# EAGLE board PCB_FINAL (EAGLE 9.7.0)
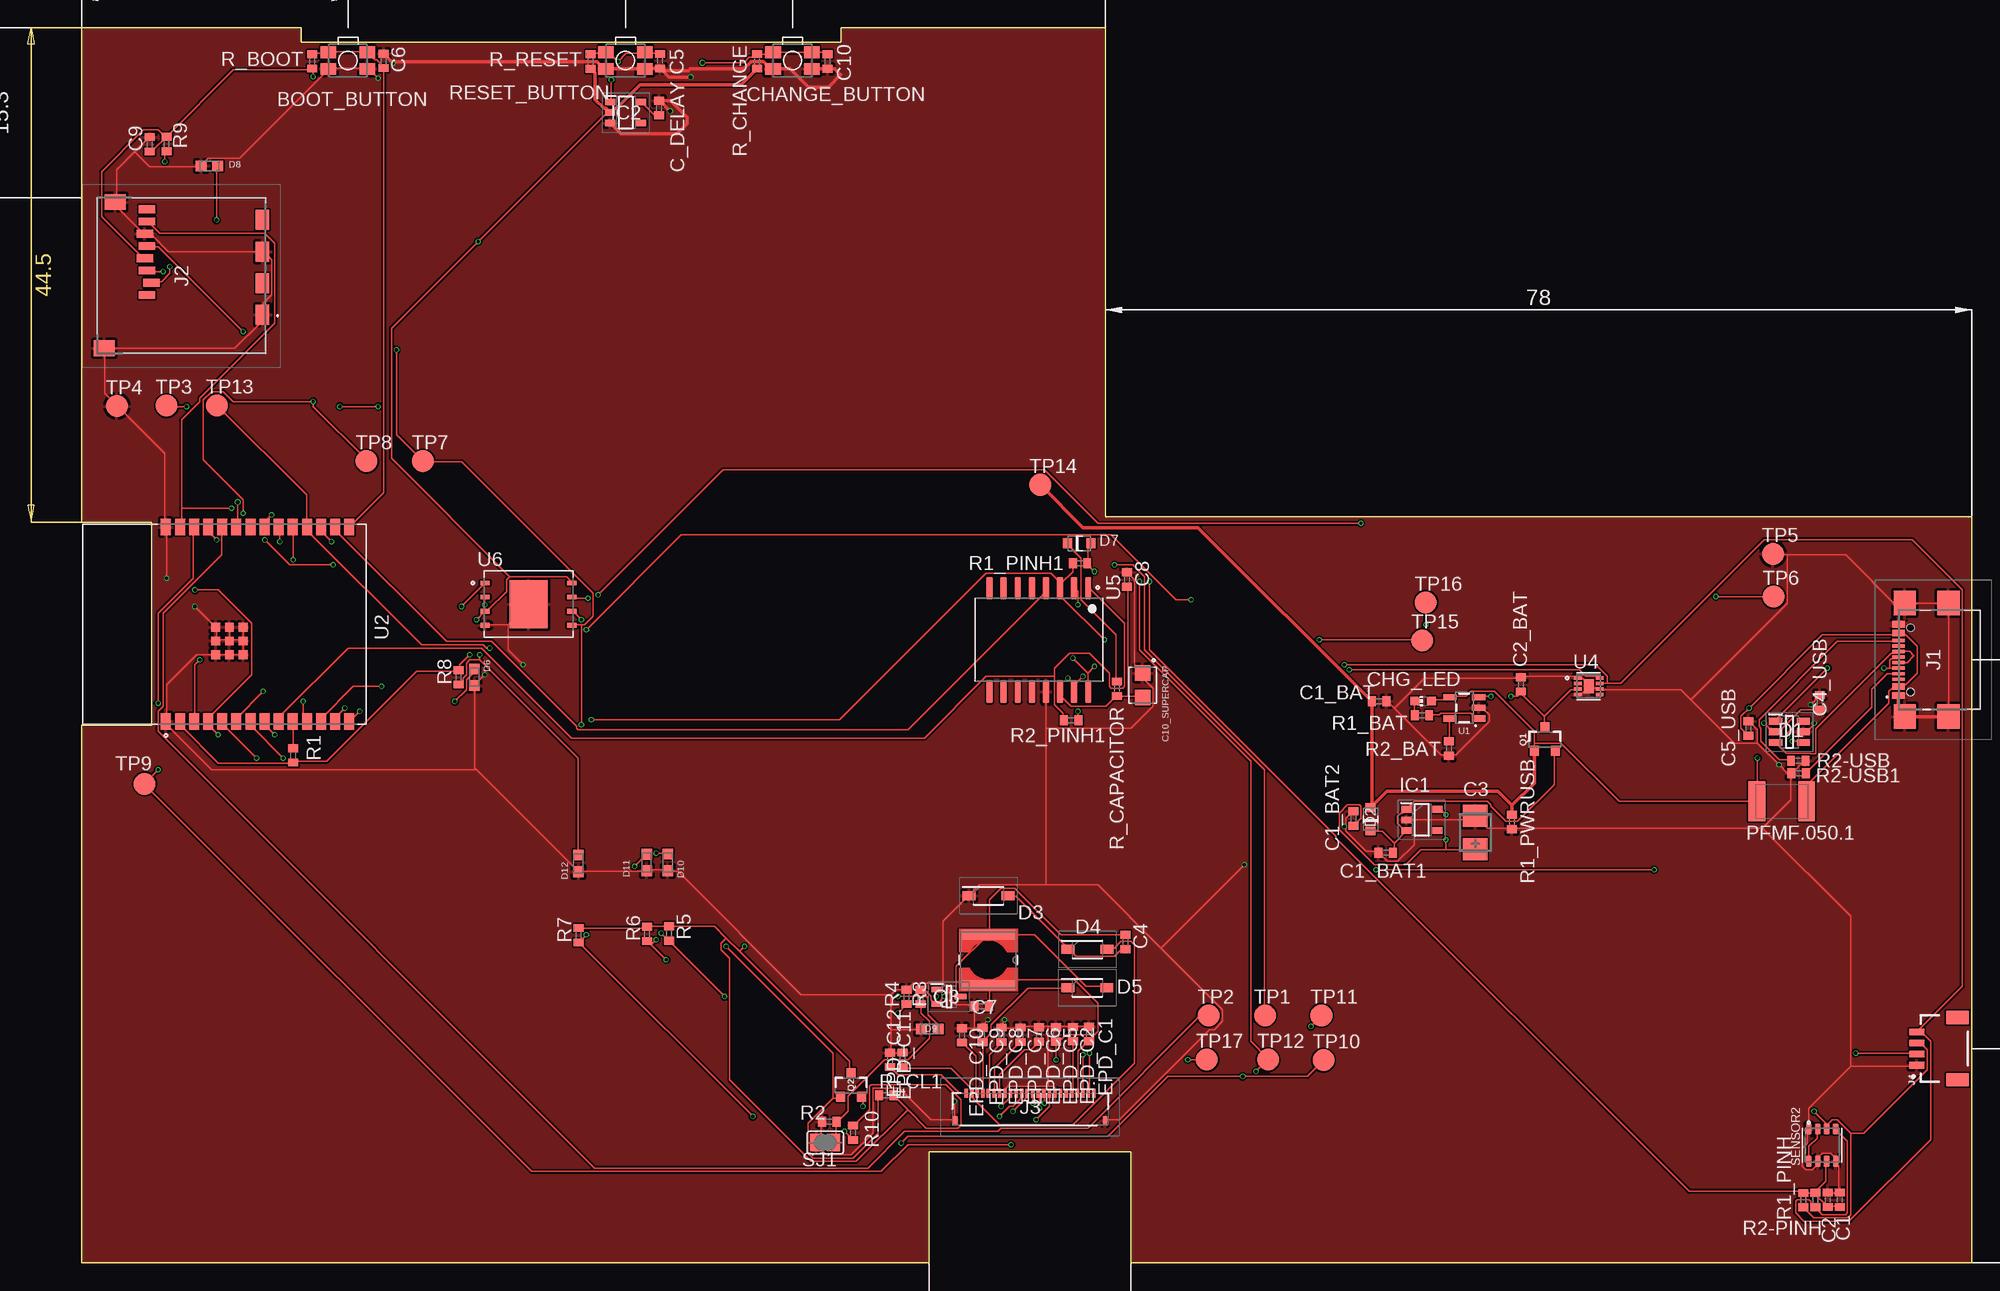
[diagram p0: board, top side]
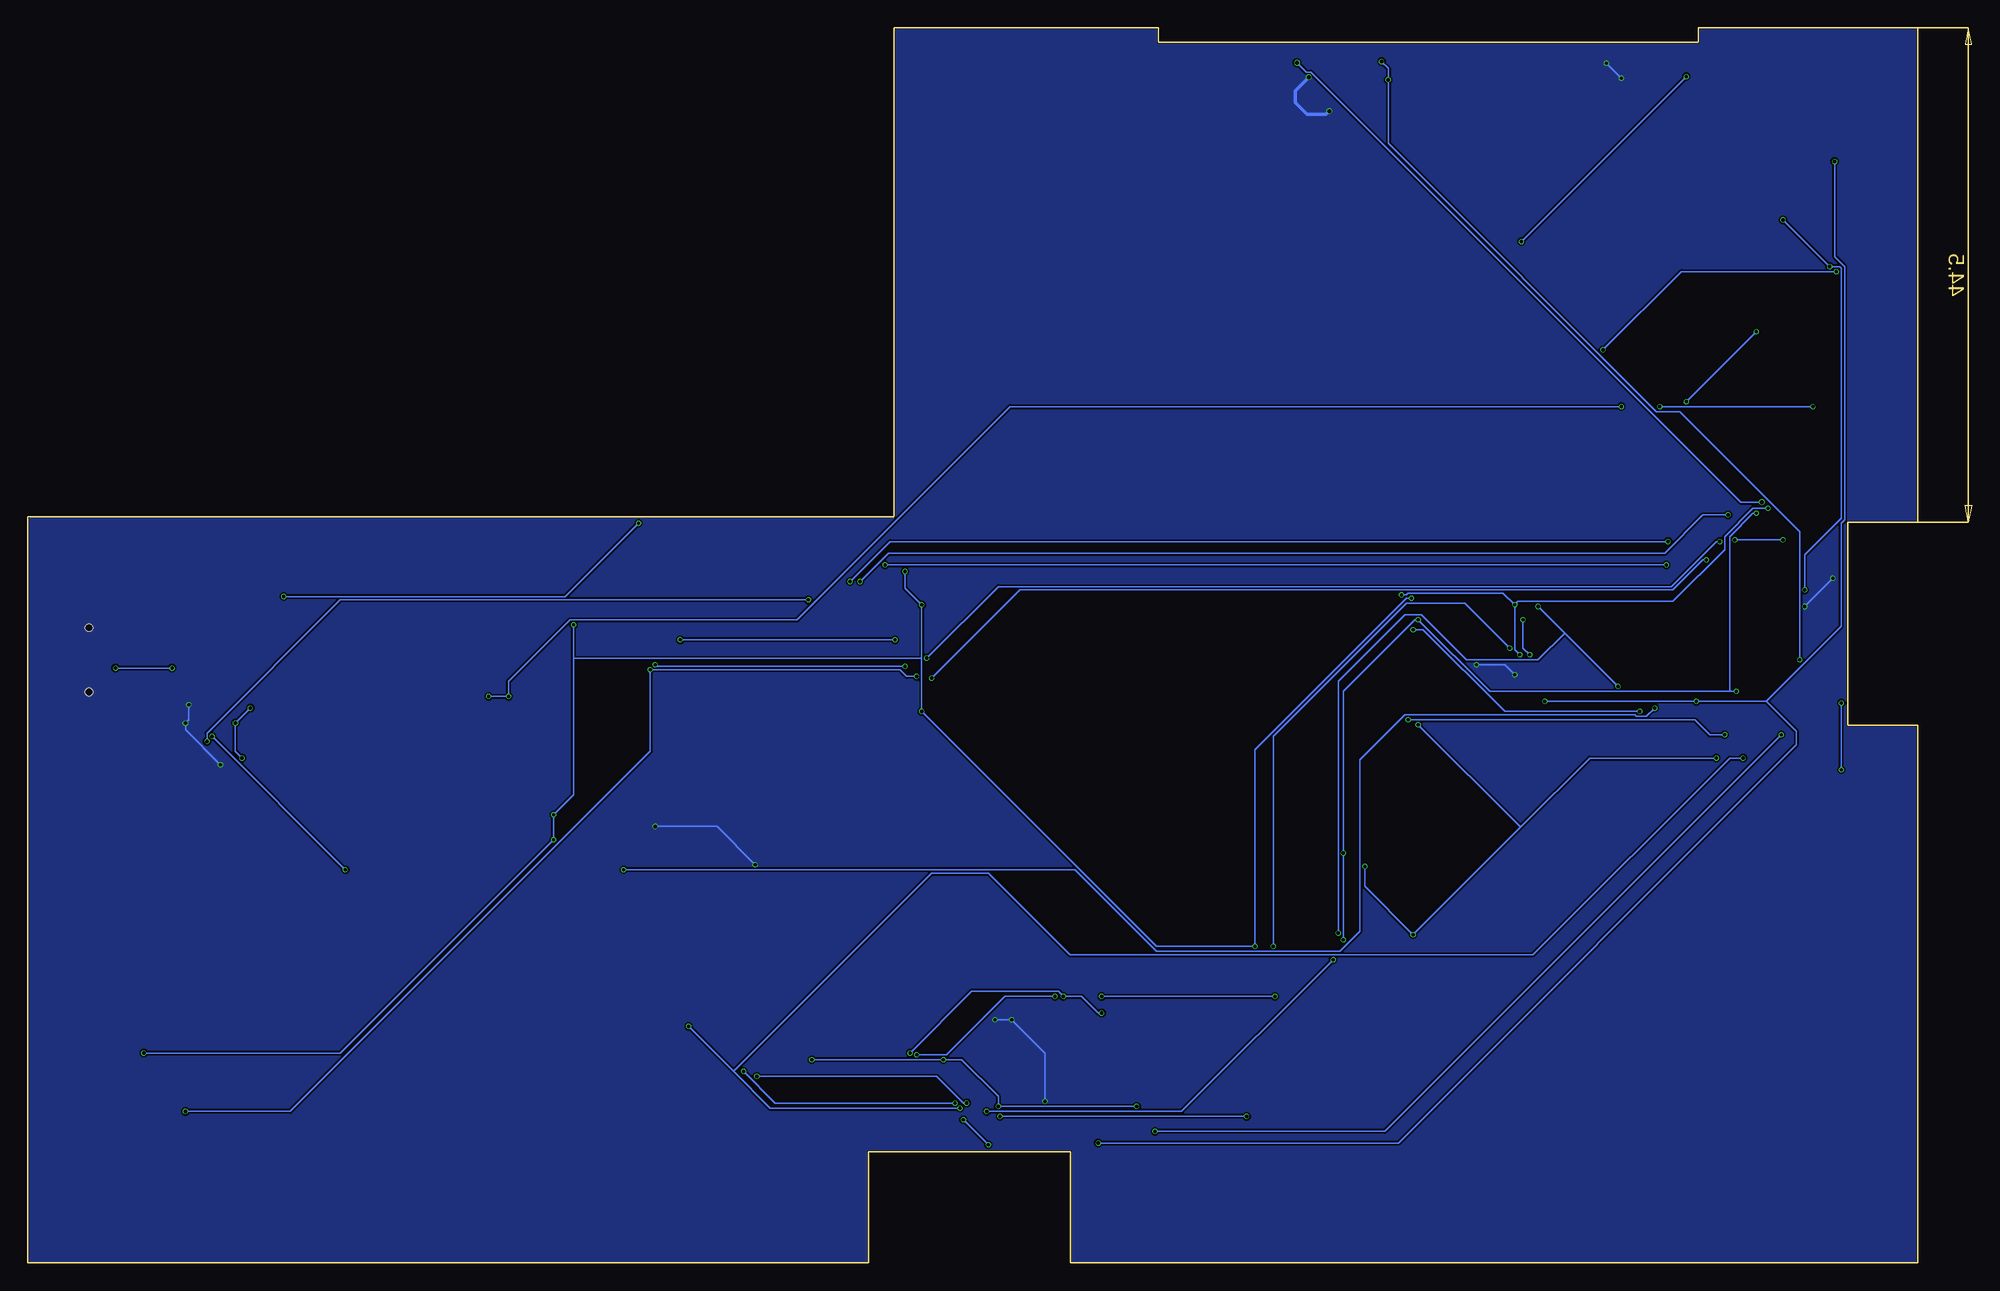
[diagram p1: board, bottom side, seen from below]

Size 170.2 x 111.2 mm. Coordinates in mm from the lower left corner, seen from the top.
Outline: 0,111.2 19.75,111.2 19.75,109.9 68.4,109.9 68.4,111.2 92.2,111.2 92.2,67.2 170.2,67.2 170.2,0 94.5,0 94.5,10 76.3,10 76.3,0 0,0 0,48.4 6.3,48.4 6.3,66.7 0,66.7 0,111.2
Copper layers (1*16): Top 0.035mm / dielectric 1.6mm / Bottom 0.035mm
Design rules "jlcpcb-2layers": minimum track width 0.15mm, minimum drill 0.3mm, track to track 0.15mm, track to pad 5mil, pad to pad 5mil, via to via 5mil, smd to smd 5mil, copper to edge 0mil, drill to drill 6mil, minimum pad ring 10mil, minimum via ring 3mil, stop-mask expansion 4mil, vias tented up to drill 0mil, thermal gap 10mil

## Footprints (pad centres in the part's own frame; a part is rotated, then mirrored left to right if it is on the bottom)
MYBUTTON = smd 1.4 x 1.05: 1 1.75,0.75; 2 -1.75,0.75; 3 -1.75,-0.75; 4 1.75,-0.75
ESP32_WROVER_EAGLE-LTSPICE_C0402 = smd 0.7 x 0.9: 1 -0.65,0; 2 0.65,0
RCL_CT3528 = smd 2 x 2.2: + -1.5,0; - 1.5,0
CAPCP3225X100N = smd 1.4 x 1.4: 1 -1.1,0; 2 1.1,0
ADAFRUIT_CHIP-LED0603 = smd 0.8 x 0.8: A 0,-0.75; C 0,0.75
SOT95P280X145-6N = smd 1.2 x 0.6: 1 -1.25,0.95; 2 -1.25,0; 3 -1.25,-0.95; 4 1.25,-0.95; 5 1.25,0; 6 1.25,0.95
ESP32_WROVER_AVX---SD0805S020S1R0_AVX_SD0805S020S1R0_0 = smd 0.8 x 0.9: 1 -1.05,0; 2 1.05,0
SOD3716X135N = smd 1.15 x 0.8: 1 -1.75,0; 2 1.75,0
DIOC1608X36N = smd 0.97 x 0.94: 1 -0.75,0; 2 0.75,0
SOT95P280X120-5N = smd 0.9 x 0.6: 1 -1.4,0.95; 2 -1.4,0; 3 -1.4,-0.95; 4 1.4,-0.95; 5 1.4,0.95
SOT95P280X125-5N = smd 0.9 x 0.6: 1 -1.4,0.95; 2 -1.4,0; 3 -1.4,-0.95; 4 1.4,-0.95; 5 1.4,0.95
SAMACSYS_PARTS_USB4110GFA = smd 0.3 x 1.15: A1 -3.35,3.678; A4 -2.55,3.678; A5 -1.25,3.678; A6 -0.25,3.678; A7 0.25,3.678; A8 1.25,3.678; A9 2.55,3.678; A12 3.35,3.678; B1 3.05,3.678; B4 2.25,3.678; B5 1.75,3.678; B6 0.75,3.678; B7 -0.75,3.678; B8 -1.75,3.678; B9 -2.25,3.678; B12 -3.05,3.678 | smd 2.18 x 2: MP1 -5.11,-0.827; MP2 5.11,-0.827; MP3 -5.11,3.103; MP4 5.11,3.103 | hole 0.65: -2.89,2.603; 2.89,2.603
112ATAARR03ATTEND = smd 1.8 x 1.2: G1 10.6,10.4; G2 4.9,10.4; S1 7.75,10.4; S2 2.05,10.4 | smd 1.4 x 1.9: G3 13.6,-3.85; G4 0.45,-2.85 | smd 0.7 x 1.5: P1 8.8,0; P2 7.7,0.4; P3 6.6,0; P4 5.5,-0.2; P5 4.4,0; P6 3.3,-0.2; P7 2.2,0; P8 1.1,0
FH34SRJ24S05SH99 = smd 0.3 x 0.8: 1 5.75,1.45; 2 5.25,1.45; 3 4.75,1.45; 4 4.25,1.45; 5 3.75,1.45; 6 3.25,1.45; 7 2.75,1.45; 8 2.25,1.45; 9 1.75,1.45; 10 1.25,1.45; 11 0.75,1.45; 12 0.25,1.45; 13 -0.25,1.45; 14 -0.75,1.45; 15 -1.25,1.45; 16 -1.75,1.45; 17 -2.25,1.45; 18 -2.75,1.45; 19 -3.25,1.45; 20 -3.75,1.45; 21 -4.25,1.45; 22 -4.75,1.45; 23 -5.25,1.45; 24 -5.75,1.45 | smd 0.4 x 0.8: MP1 6.75,-1.05; MP2 -6.75,-1.05
JST04_1MM_RA = smd 0.6 x 1.35: 1 -1.5,0; 2 -0.5,0; 3 0.5,0; 4 1.5,0 | smd 1.2 x 2: NC1 2.8,-3.675; NC2 -2.8,-3.675
IND_4828-WE-TPC_WRE = smd 0.889 x 4.826: 1 -2.286,0; 2 2.286,0
ESP32C6_VARISTOR_CT/CN1812 = smd 1.5 x 3.6: 1 -2.25,0; 2 2.25,0
ESP32_WROVER_SPARKFUN-DISCRETESEMI_SOT23-3 = smd 0.8 x 0.9: 1 -0.95,-1; 2 0.95,-1; 3 0,1.1
SOT65P210X110-3N = smd 1.05 x 0.5: 1 -1.05,0.65; 2 -1.05,-0.65; 3 1.05,0
ESP32_WROVER_EAGLE-LTSPICE_R0402 = smd 0.7 x 0.9: 1 -0.65,0; 2 0.65,0
ESP32_WROVER_BME680_PSON80P300X300X100-8N = smd 1.016 x 0.5: 1 1.458,1.2; 2 1.458,0.4; 3 1.458,-0.4; 4 1.458,-1.2; 5 -1.458,-1.22; 6 -1.458,-0.4; 7 -1.458,0.4; 8 -1.458,1.2
SJ = smd 1.168 x 1.6: 1 -0.762,0; 2 0.762,0
TP20R = smd 2 x 2: TP 0,0
ESP32_WROVER_SPARKFUN-IC-POWER_SOT23-5 = smd 0.55 x 1.2: 1 -0.95,-1.3; 2 0,-1.3; 3 0.95,-1.3; 4 0.95,1.3; 5 -0.95,1.3
XCVR_ESP32-C6-WROOM-1-N8 = smd 1.5 x 0.9: 1 -8.75,5.26; 2 -8.75,3.99; 3 -8.75,2.72; 4 -8.75,1.45; 5 -8.75,0.18; 6 -8.75,-1.09; 7 -8.75,-2.36; 8 -8.75,-3.63; 9 -8.75,-4.9; 10 -8.75,-6.17; 11 -8.75,-7.44; 12 -8.75,-8.71; 13 -8.75,-9.98; 14 -8.75,-11.25; 15 8.75,-11.25; 16 8.75,-9.98; 17 8.75,-8.71; 18 8.75,-7.44; 19 8.75,-6.17; 20 8.75,-4.9; 21 8.75,-3.63; 22 8.75,-2.36; 23 8.75,-1.09; 24 8.75,0.18; 25 8.75,1.45; 26 8.75,2.72; 27 8.75,3.99; 28 8.75,5.26 | smd 0.8 x 0.8: 29_1 -2.755,0.79; 29_2 -1.505,0.79; 29_3 -0.255,0.79; 29_4 -2.755,-0.46; 29_5 -1.505,-0.46; 29_6 -0.255,-0.46; 29_7 -2.755,-1.71; 29_8 -1.505,-1.71; 29_9 -0.255,-1.71
SON50P200X200X80-9N = smd 0.76 x 0.27: 1 -0.985,0.75; 2 -0.985,0.25; 3 -0.985,-0.25; 4 -0.985,-0.75; 5 0.985,-0.75; 6 0.985,-0.25; 7 0.985,0.25; 8 0.985,0.75 | smd 0.9 x 1.3: 9 0,0
SOIC127P1032X265-16N = smd 2.05 x 0.59: 1 -4.655,4.445; 2 -4.655,3.175; 3 -4.655,1.905; 4 -4.655,0.635; 5 -4.655,-0.635; 6 -4.655,-1.905; 7 -4.655,-3.175; 8 -4.655,-4.445; 9 4.655,-4.445; 10 4.655,-3.175; 11 4.655,-1.905; 12 4.655,-0.635; 13 4.655,0.635; 14 4.655,1.905; 15 4.655,3.175; 16 4.655,4.445
SON127P600X800X80-9N = smd 0.94 x 0.44: 1 -3.895,1.905; 2 -3.895,0.635; 3 -3.895,-0.635; 4 -3.895,-1.905; 5 3.895,-1.905; 6 3.895,-0.635; 7 3.895,0.635; 8 3.895,1.905 | smd 3.4 x 4.3: 9 0,0

## Placement (x,y rotation side)
BOOT_BUTTON  BUTTON_CUSYOMV1  [MYBUTTON]  23.98,108.25 180 top
C1  100nF  [ESP32_WROVER_EAGLE-LTSPICE_C0402]  158.32,5.69 90 top
C1_BAT  4.7uF  [ESP32_WROVER_EAGLE-LTSPICE_C0402]  116.83,50.55 0 top
C1_BAT1  4.7uF  [ESP32_WROVER_EAGLE-LTSPICE_C0402]  117.42,36.93 180 top
C1_BAT2  4.7uF  [ESP32_WROVER_EAGLE-LTSPICE_C0402]  114.53,40.02 90 top
C2  100nF  [ESP32_WROVER_EAGLE-LTSPICE_C0402]  157.23,5.69 90 top
C2_BAT  4.7uF  [ESP32_WROVER_EAGLE-LTSPICE_C0402]  129.6,52.09 90 top
C3  100uF TANT  [RCL_CT3528]  125.5,38.75 90 top
C4  4.7uF/25V  [ESP32_WROVER_EAGLE-LTSPICE_C0402]  94.01,28.9 90 top
C4_USB  100nF  [ESP32_WROVER_EAGLE-LTSPICE_C0402]  156.53,50.48 90 top
C5  1uF  [ESP32_WROVER_EAGLE-LTSPICE_C0402]  52.11,108.19 270 top
C5_USB  4.7uF  [ESP32_WROVER_EAGLE-LTSPICE_C0402]  150.06,48.12 90 top
C6  100nF  [ESP32_WROVER_EAGLE-LTSPICE_C0402]  27.18,108.22 90 top
C7  10uF  [ESP32_WROVER_EAGLE-LTSPICE_C0402]  81.06,23.12 180 top
C8  100nF  [ESP32_WROVER_EAGLE-LTSPICE_C0402]  94.12,61.53 90 top
C9  100nF  [ESP32_WROVER_EAGLE-LTSPICE_C0402]  6.12,100.71 90 top
C10  100nF  [ESP32_WROVER_EAGLE-LTSPICE_C0402]  67.18,108.16 270 top
C10_SUPERCAP  CPH3225A  [CAPCP3225X100N]  95.54,52.01 270 top
C_DELAY  100nF  [ESP32_WROVER_EAGLE-LTSPICE_C0402]  52.01,103.98 90 top
CHANGE_BUTTON  BUTTON_CUSYOMV1  [MYBUTTON]  64.01,108.25 180 top
CHG_LED  [ADAFRUIT_CHIP-LED0603]  120.8,50.59 90 top
D1  USBLC6-2SC6Y  [SOT95P280X145-6N]  153.78,47.82 0 top
D2  ESP32_WROVER_AVX---SD0805S020S1R0_AVX_SD0805S020S1R0_0_0AVX_SD0805S020S1R0_0_0  [ESP32_WROVER_AVX---SD0805S020S1R0_AVX_SD0805S020S1R0_0]  116.07,39.94 90 top
D3  MBR0530  [SOD3716X135N]  81.66,33.07 0 top
D4  MBR0530  [SOD3716X135N]  90.57,28.23 0 top
D5  MBR0530  [SOD3716X135N]  90.56,24.78 0 top
D6  PGB1010603MR  [DIOC1608X36N]  35.38,52.73 90 top
D7  ESP32_WROVER_AVX---SD0805S020S1R0_AVX_SD0805S020S1R0_0_0AVX_SD0805S020S1R0_0_0  [ESP32_WROVER_AVX---SD0805S020S1R0_AVX_SD0805S020S1R0_0]  89.84,64.78 0 top
D8  PGB1010603MR  [DIOC1608X36N]  11.51,98.77 0 top
D9  PGB1010603MR  [DIOC1608X36N]  76.39,21.07 0 top
D10  PGB1010603MR  [DIOC1608X36N]  52.78,36.07 90 top
D11  PGB1010603MR  [DIOC1608X36N]  50.88,36.05 90 top
D12  PGB1010603MR  [DIOC1608X36N]  44.73,35.98 90 top
EPD_C1  1uF/50V  [ESP32_WROVER_EAGLE-LTSPICE_C0402]  90.72,20.61 270 top
EPD_C2  1uF/50V  [ESP32_WROVER_EAGLE-LTSPICE_C0402]  89.27,20.6 270 top
EPD_C5  1uF/50V  [ESP32_WROVER_EAGLE-LTSPICE_C0402]  87.75,20.57 270 top
EPD_C6  1uF/50V  [ESP32_WROVER_EAGLE-LTSPICE_C0402]  86.2,20.56 270 top
EPD_C7  1uF/50V  [ESP32_WROVER_EAGLE-LTSPICE_C0402]  84.55,20.55 270 top
EPD_C8  1uF/50V  [ESP32_WROVER_EAGLE-LTSPICE_C0402]  82.85,20.54 270 top
EPD_C9  1uF/50V  [ESP32_WROVER_EAGLE-LTSPICE_C0402]  81.1,20.53 270 top
EPD_C10  1uF/50V  [ESP32_WROVER_EAGLE-LTSPICE_C0402]  79.29,20.49 270 top
EPD_C11  1uF/50V  [ESP32_WROVER_EAGLE-LTSPICE_C0402]  73.91,18.29 270 top
EPD_C12  1uF/50V  [ESP32_WROVER_EAGLE-LTSPICE_C0402]  72.81,18.29 270 top
IC1  XC6220A331MR-G  [SOT95P280X120-5N]  120.68,39.89 0 top
IC2  BD5229G-TR  [SOT95P280X125-5N]  49,103.57 0 top
J1  SAMACSYS_PARTS_USB4110-GF-A  [SAMACSYS_PARTS_USB4110GFA]  167.28,54.3 90 top
J2  112A-TAAR-R03_ATTEND  [112ATAARR03ATTEND]  5.89,95.95 270 top
J3  FH34SRJ-24S-0.5SH_99_  [FH34SRJ24S05SH99]  85.4,13.84 0 top
J4  QWIIC_RIGHT_ANGLE  [JST04_1MM_RA]  165.25,19.3 90 top
L1  68uH  [IND_4828-WE-TPC_WRE]  81.65,27.28 270 top
PFMF.050.1  ESP32C6_VARISTORCN1812  [ESP32C6_VARISTOR_CT/CN1812]  153.09,41.55 0 top
Q1  20V/4.2A/52mΩ/1.4W  [ESP32_WROVER_SPARKFUN-DISCRETESEMI_SOT23-3]  131.76,47.11 0 top
Q2  20V/4.2A/52mΩ/1.4W  [ESP32_WROVER_SPARKFUN-DISCRETESEMI_SOT23-3]  69.28,15.96 0 top
Q3  SI1308EDL-T1-GE3  [SOT65P210X110-3N]  78.09,23.98 0 top
R1  10K  [ESP32_WROVER_EAGLE-LTSPICE_R0402]  19.03,45.7 270 top
R1_BAT  200  [ESP32_WROVER_EAGLE-LTSPICE_R0402]  120.7,49.3 0 top
R1_PINH  10K  [ESP32_WROVER_EAGLE-LTSPICE_R0402]  155.03,5.66 90 top
R1_PINH1  10K  [ESP32_WROVER_EAGLE-LTSPICE_R0402]  89.91,62.99 0 top
R1_PWRUSB  100k  [ESP32_WROVER_EAGLE-LTSPICE_R0402]  128.81,39.7 90 top
R2  2.2  [ESP32_WROVER_EAGLE-LTSPICE_R0402]  67.33,12.71 0 top
R2-PINH  10K  [ESP32_WROVER_EAGLE-LTSPICE_R0402]  156.13,5.67 90 top
R2-USB  5k1  [ESP32_WROVER_EAGLE-LTSPICE_R0402]  154.58,45.23 0 top
R2-USB1  5K1  [ESP32_WROVER_EAGLE-LTSPICE_R0402]  154.6,44.07 0 top
R2_BAT  2K  [ESP32_WROVER_EAGLE-LTSPICE_R0402]  123.1,46.31 90 top
R2_PINH1  10K  [ESP32_WROVER_EAGLE-LTSPICE_R0402]  89.11,48.84 0 top
R3  0.47  [ESP32_WROVER_EAGLE-LTSPICE_R0402]  75.52,23.96 90 top
R4  10K  [ESP32_WROVER_EAGLE-LTSPICE_R0402]  74.26,23.96 270 top
R5  10K  [ESP32_WROVER_EAGLE-LTSPICE_R0402]  52.89,29.66 90 top
R6  10K  [ESP32_WROVER_EAGLE-LTSPICE_R0402]  50.94,29.63 90 top
R7  10K  [ESP32_WROVER_EAGLE-LTSPICE_R0402]  44.74,29.5 90 top
R8  10K  [ESP32_WROVER_EAGLE-LTSPICE_R0402]  33.94,52.72 90 top
R9  10K  [ESP32_WROVER_EAGLE-LTSPICE_R0402]  7.64,100.74 90 top
R10  10K  [ESP32_WROVER_EAGLE-LTSPICE_R0402]  69.47,11.73 90 top
R_BOOT  10K  [ESP32_WROVER_EAGLE-LTSPICE_R0402]  20.78,108.18 270 top
R_CAPACITOR  15  [ESP32_WROVER_EAGLE-LTSPICE_R0402]  93.24,51.7 270 top
R_CHANGE  10K  [ESP32_WROVER_EAGLE-LTSPICE_R0402]  60.84,108.18 270 top
R_CL1  10K  [ESP32_WROVER_EAGLE-LTSPICE_R0402]  72.46,15.08 0 top
R_RESET  10K  [ESP32_WROVER_EAGLE-LTSPICE_R0402]  45.84,108.16 270 top
RESET_BUTTON  BUTTON_CUSYOMV1  [MYBUTTON]  48.97,108.25 180 top
SENSOR2  ESP32_WROVER_BME680_BME680  [ESP32_WROVER_BME680_PSON80P300X300X100-8N]  156.73,10.6 90 top
SJ1  [SJ]  66.96,10.84 0 top
TP1  TPTP20R  [TP20R]  106.56,22.29 0 top
TP2  TPTP20R  [TP20R]  101.48,22.29 0 top
TP3  TPTP20R  [TP20R]  7.65,77.19 0 top
TP4  TPTP20R  [TP20R]  3.17,77.14 0 top
TP5  TPTP20R  [TP20R]  152.29,63.84 0 top
TP6  TPTP20R  [TP20R]  152.36,59.99 0 top
TP7  TPTP20R  [TP20R]  30.73,72.19 0 top
TP8  TPTP20R  [TP20R]  25.65,72.19 0 top
TP9  TPTP20R  [TP20R]  5.67,43.14 0 top
TP10  TPTP20R  [TP20R]  111.83,18.26 0 top
TP11  TPTP20R  [TP20R]  111.64,22.29 0 top
TP12  TPTP20R  [TP20R]  106.83,18.31 0 top
TP13  TPTP20R  [TP20R]  12.18,77.21 0 top
TP14  TPTP20R  [TP20R]  86.33,70.06 0 top
TP15  TPTP20R  [TP20R]  120.73,56.06 0 top
TP16  TPTP20R  [TP20R]  121.03,59.46 0 top
TP17  TPTP20R  [TP20R]  101.33,18.31 0 top
U1  ESP32_WROVER_SPARKFUN-IC-POWER_MCP73831  [ESP32_WROVER_SPARKFUN-IC-POWER_SOT23-5]  124.51,49.97 90 top
U2  ESP32-C6-WROOM-1-N8  [XCVR_ESP32-C6-WROOM-1-N8]  12.85,57.5 90 top
U4  MAX17048G+T10  [SON50P200X200X80-9N]  135.71,51.92 0 top
U5  DS3231SN#  [SOIC127P1032X265-16N]  86.2,56.1 270 top
U6  W25Q512JVEIQ  [SON127P600X800X80-9N]  40.24,59.31 0 top

## Library data of the parts
BOOT_BUTTON CHANGE_BUTTON CHG_LED PFMF.050.1 RESET_BUTTON SJ1 TP1-TP17 = DeskAssistant v19 v1
C1 C1_BAT C1_BAT1 C1_BAT2 C2 C2_BAT C4 C4_USB C5 C5_USB C6-C10 C_DELAY EPD_C1 EPD_C2 EPD_C5-EPD_C12 = DeskAssistant v19 v1; SPICEMODEL: NONE; SPICEPREFIX: C
C3 = DeskAssistant v19 v1; SPICEPREFIX: C
C10_SUPERCAP = DeskAssistant v19 v1; AVAILABILITY: Not in stock; CHECK_PRICES: https://www.snapeda.com/parts/CPH3225A/Seiko+Instruments/view-part/?ref=eda; DESCRIPTION: 11 mF (EDLC) Supercapacitor 3.3 V 1210 (3225 Metric) - -; MF: Seiko Instruments; MP: CPH3225A; PACKAGE: 1210 Seiko; PRICE: None; PURCHASE-URL: https://www.snapeda.com/api/url_track_click_mouser/?unipart_id=562593&manufacturer=Seiko Instruments&part_name=CPH3225A&search_term=None; SNAPEDA_LINK: https://www.snapeda.com/parts/CPH3225A/Seiko+Instruments/view-part/?ref=snap
D1 = DeskAssistant v19 v1; AVAILABILITY: In Stock; CHECK_PRICES: https://www.snapeda.com/parts/USBLC6-2SC6Y/STMicroelectronics/view-part/?ref=eda; DESCRIPTION: 17V Clamp 5A (8/20µs) Ipp Tvs Diode Surface Mount SOT-23-6; MF: STMicroelectronics; MP: USBLC6-2SC6Y; PACKAGE: SOT-23-6 STMicroelectronics; PRICE: None; SNAPEDA_LINK: https://www.snapeda.com/parts/USBLC6-2SC6Y/STMicroelectronics/view-part/?ref=snap
D2 D7 = DeskAssistant v19 v1; CENTROID_NOT_SPECIFIED: No; DATASHEET: http://datasheets.avx.com/schottky.pdf; DIGIKEY_DESCRIPTION: DIODE SCHOTTKY 20V 1A 0805; DIGIKEY_PART_NUMBER: 478-7800-1-ND; LEAD_FREE: yes; MF: AVX; MOUSER_PART_NUMBER: 581-SD0805S020S1R0; PACKAGE: 0805 (2012 metric); PREFIX: D; ROHS: yes; TEMPERATURE_RANGE_HIGH: +125°C; TEMPERATURE_RANGE_LOW: -55°C
D3-D5 = DeskAssistant v19 v1; AVAILABILITY: In Stock; CHECK_PRICES: https://www.snapeda.com/parts/MBR0530/Onsemi/view-part/?ref=eda; DESCRIPTION: Diode Schottky 30 V 500mA Surface Mount SOD-123; MF: ON Semiconductor; MP: MBR0530; PACKAGE: SOD-123-2 ON Semiconductor; PRICE: None; PURCHASE-URL: https://www.snapeda.com/api/url_track_click_mouser/?unipart_id=179458&manufacturer=ON Semiconductor&part_name=MBR0530&search_term=None; SNAPEDA_LINK: https://www.snapeda.com/parts/MBR0530/Onsemi/view-part/?ref=snap
D6 D8-D12 = DeskAssistant v19 v1; AVAILABILITY: In Stock; CHECK_PRICES: https://www.snapeda.com/parts/PGB1010603MR/Littelfuse/view-part/?ref=eda; DESCRIPTION: 150V (Typ) Clamp - Ipp Tvs Diode Surface Mount 0603 (1608 Metric); MF: Littelfuse Inc.; MP: PGB1010603MR; PACKAGE: 0603 Littelfuse Inc.; PRICE: None; PURCHASE-URL: https://www.snapeda.com/api/url_track_click_mouser/?unipart_id=5659453&manufacturer=Littelfuse Inc.&part_name=PGB1010603MR&search_term=None; SNAPEDA_LINK: https://www.snapeda.com/parts/PGB1010603MR/Littelfuse/view-part/?ref=snap
IC1 = DeskAssistant v19 v1; DESCRIPTION: LDO Voltage Regulators; HEIGHT: 1.2mm; MANUFACTURER_NAME: Torex; MANUFACTURER_PART_NUMBER: XC6220A331MR-G; MOUSER_PART_NUMBER: 865-XC6220A331MR-G; MOUSER_PRICE-STOCK: https://www.mouser.co.uk/ProductDetail/Torex-Semiconductor/XC6220A331MR-G?qs=AsjdqWjXhJ8ZSWznL1J0gg%3D%3D
IC2 = DeskAssistant v19 v1; DESCRIPTION: Voltage Detector with Adjustable Delay Time: CMOS processes are utilized to develop high precision, low current consumption CMOS reset ICs that allow arbitrary setting of the delay time. The extensive lineup includes both Nch Open Drain and CMOS output types in a wide range of detection voltages (from 2.3V to 6.0V, in 0.1V steps), enabling selection of the ideal solution based on customer requirements. In addition, the entire series is of course both lead-free and RoHS-compliant.; HEIGHT: 1.25mm; MANUFACTURER_NAME: ROHM Semiconductor; MANUFACTURER_PART_NUMBER: BD5229G-TR; MOUSER_PART_NUMBER: 755-BD5229G-TR; MOUSER_PRICE-STOCK: https://www.mouser.co.uk/ProductDetail/ROHM-Semiconductor/BD5229G-TR?qs=4kLU8WoGk0vvnhrrYwdszw%3D%3D
J1 = DeskAssistant v19 v1; DESCRIPTION: CONN USB 2.0 TYPE-C R/A SMT; HEIGHT: 3.26mm; MANUFACTURER_NAME: GCT (GLOBAL CONNECTOR TECHNOLOGY); MANUFACTURER_PART_NUMBER: USB4110-GF-A; MOUSER_PART_NUMBER: 640-USB4110-GF-A; MOUSER_PRICE-STOCK: https://www.mouser.co.uk/ProductDetail/GCT/USB4110-GF-A?qs=KUoIvG%2F9IlYiZvIXQjyJeA%3D%3D
J2 = DeskAssistant v19 v1; DESCRIPTION: Micro SD Card Socket, Push-Push Type, Top Mount, SMT, H=1.83mm, 10u; HEIGHT: 1.9mm; MANUFACTURER_NAME: ATTEND; MANUFACTURER_PART_NUMBER: 112A-TAAR-R03 ATTEND
J3 = DeskAssistant v19 v1; DESCRIPTION: 24 Position FFC, FPC Connector Contacts, Top and Bottom 0.020" (0.50mm) Surface Mount, Right Angle; HEIGHT: 1.1mm; MANUFACTURER_NAME: Hirose; MANUFACTURER_PART_NUMBER: FH34SRJ-24S-0.5SH(99); MOUSER_PART_NUMBER: 798-FH34SRJ24S05SH99; MOUSER_PRICE-STOCK: https://www.mouser.co.uk/ProductDetail/Hirose-Connector/FH34SRJ-24S-0.5SH99?qs=vcbW%252B4%252BSTIpKBl5ap9J8Fw%3D%3D
J4 = DeskAssistant v19 v1; PROD_ID: CONN-13694
L1 = DeskAssistant v19 v1; COPYRIGHT: Copyright (C) 2024 Ultra Librarian. All rights reserved.; MANUFACTURER_PART_NUMBER: 744043680; MFR_NAME: Wurth Electronics
Q1 Q2 = DeskAssistant v19 v1; PROD_ID: TRAN-14388
Q3 = DeskAssistant v19 v1; AVAILABILITY: In Stock; CHECK_PRICES: https://www.snapeda.com/parts/SI1308EDL-T1-GE3/Vishay+Siliconix/view-part/?ref=eda; DESCRIPTION: Si1308EDL-T1-GE3 N-channel MOSFET Transistor, 1.5 A, 30 V, 3-Pin SC-70 | Siliconix / Vishay SI1308EDL-T1-GE3; MF: Vishay Siliconix; MP: SI1308EDL-T1-GE3; PACKAGE: SOT-323 Vishay Semiconductor; PRICE: None; PURCHASE-URL: https://www.snapeda.com/api/url_track_click_mouser/?unipart_id=274603&manufacturer=Vishay Siliconix&part_name=SI1308EDL-T1-GE3&search_term=None; SNAPEDA_LINK: https://www.snapeda.com/parts/SI1308EDL-T1-GE3/Vishay+Siliconix/view-part/?ref=snap
R1 R1_BAT R1_PINH R1_PINH1 R1_PWRUSB R2 R2-PINH R2-USB R2-USB1 R2_BAT R2_PINH1 R3-R10 R_BOOT R_CAPACITOR R_CHANGE R_CL1 R_RESET = DeskAssistant v19 v1; SPICEMODEL: NONE; SPICEPREFIX: R
SENSOR2 = DeskAssistant v19 v1; AVAILABILITY: Unavailable; DESCRIPTION: Integrated Environmental Unit; MF: Bosch Sensortec; MP: BME680; PACKAGE: LGA-8 Bosch Tools; PRICE: None
U1 = DeskAssistant v19 v1; PROD_ID: IC-09995
U2 = DeskAssistant v19 v1; AVAILABILITY: In Stock; CHECK_PRICES: https://www.snapeda.com/parts/ESP32-C6-WROOM-1-N8/Espressif+Systems/view-part/?ref=eda; DESCRIPTION: Multiprotocol Modules ESP32-C6 module, Wi-Fi 6 in 2.4 GHz band, Bluetooth 5, Zigbee 3.0 and Thread. ESP34-WROOM Compatible - ENGINEERING SAMPLE; MF: Espressif Systems; MP: ESP32-C6-WROOM-1-N8; PACKAGE: None; PRICE: None; SNAPEDA_LINK: https://www.snapeda.com/parts/ESP32-C6-WROOM-1-N8/Espressif+Systems/view-part/?ref=snap
U4 = DeskAssistant v19 v1; AVAILABILITY: In Stock; CHECK_PRICES: https://www.snapeda.com/parts/MAX17048G+T10/Analog+Devices/view-part/?ref=eda; DESCRIPTION: 3µA 1-Cell/2-Cell Fuel Gauge with ModelGauge; MF: Analog Devices; MP: MAX17048G+T10; PACKAGE: TDFN-8 Maxim; PRICE: None; PURCHASE-URL: https://www.snapeda.com/api/url_track_click_mouser/?unipart_id=329239&manufacturer=Analog Devices&part_name=MAX17048G+T10&search_term=None; SNAPEDA_LINK: https://www.snapeda.com/parts/MAX17048G+T10/Analog+Devices/view-part/?ref=snap
U5 = DeskAssistant v19 v1; AVAILABILITY: In Stock; CHECK_PRICES: https://www.snapeda.com/parts/DS3231SN%23/Analog+Devices/view-part/?ref=eda; DESCRIPTION: Extremely Accurate I²C-Integrated RTC/TCXO/Crystal; MF: Analog Devices; MP: DS3231SN#; PACKAGE: SOIC-16 Maxim; PRICE: None; PURCHASE-URL: https://www.snapeda.com/api/url_track_click_mouser/?unipart_id=99048&manufacturer=Analog Devices&part_name=DS3231SN#&search_term=None; SNAPEDA_LINK: https://www.snapeda.com/parts/DS3231SN%23/Analog+Devices/view-part/?ref=snap
U6 = DeskAssistant v19 v1; AVAILABILITY: In Stock; CHECK_PRICES: https://www.snapeda.com/parts/W25Q512JVEIQ/Winbond+Electronics/view-part/?ref=eda; DESCRIPTION: FLASH - NOR Memory IC 512Mb (64M x 8) SPI - Quad I/O 133 MHz 8-WSON (8x6); MF: Winbond Electronics; MP: W25Q512JVEIQ; PACKAGE: Package; PRICE: None; SNAPEDA_LINK: https://www.snapeda.com/parts/W25Q512JVEIQ/Winbond+Electronics/view-part/?ref=snap

## Nets
3V3: C1_BAT2.1 C3.+ C9.1 D7.2 IC1.5 IC2.2 J2.P4 J4.2 Q2.3 R1.2 R1_PINH1.2 R2_PINH1.2 R5.2 R6.2 R7.2 R8.2 R9.2 R10.2 R_BOOT.2 R_CHANGE.2 R_CL1.2 R_RESET.2 TP16.TP U2.2 U5.2 U6.3 U6.7 U6.8
32KHZ: R2_PINH1.1 U2.9 U5.1
DN: D1.1 J1.A7 J1.B7
DP: D1.3 J1.A6 J1.B6
EPD_3V3: C7.1 EPD_C5.2 J3.15 J3.16 L1.2 Q2.2 TP17.TP
EPD_3V3_C: Q2.1 R_CL1.1 TP13.TP U2.18
EPD_BUSY: J3.9 TP9.TP U2.26
EPD_CS: D6.2 J3.12 R9.1 TP10.TP U2.11
EPD_DC: J3.11 TP11.TP U2.5
EPD_RST: J3.10 TP12.TP U2.21
FLASH_CS: D9.2 R5.1 U2.12 U6.1
GDR: J3.2 Q3.1 R4.2
GND: BOOT_BUTTON.1 BOOT_BUTTON.2 C1.2 C1_BAT1.2 C1_BAT2.2 C1_BAT.2 C2.2 C2_BAT.2 C3.- C4_USB.2 C5.2 C5_USB.2 C6.2 C7.2 C8.2 C9.2 C10.2 C10_SUPERCAP.1 C_DELAY.2 CHANGE_BUTTON.1 CHANGE_BUTTON.2 D1.5 D3.1 D6.1 D8.1 D9.1 D10.1 D11.1 D12.1 EPD_C1.1 EPD_C2.1 EPD_C5.1 EPD_C6.1 EPD_C7.1 EPD_C8.1 EPD_C9.1 EPD_C10.1 EPD_C11.1 EPD_C12.1 IC1.2 IC2.3 J1.A1 J1.A12 J1.B1 J1.B12 J1.MP1 J1.MP2 J1.MP3 J1.MP4 J2.G1 J2.G2 J2.G3 J2.G4 J2.P6 J3.8 J3.17 J3.MP1 J3.MP2 J4.1 R1_PWRUSB.1 R2-USB1.1 R2-USB.2 R2.1 R2_BAT.1 R4.1 RESET_BUTTON.1 RESET_BUTTON.2 SENSOR2.1 SENSOR2.5 SENSOR2.7 SJ1.1 TP4.TP TP5.TP U1.2 U2.1 U2.28 U2.29_1 U2.29_2 U2.29_3 U2.29_4 U2.29_5 U2.29_6 U2.29_7 U2.29_8 U2.29_9 U4.1 U4.4 U4.6 U4.9 U5.13 U6.4 U6.9
GPIO8: R1.1 U2.10
I2C_PW: C1.1 C2.1 R1_PINH.2 R2-PINH.2 SENSOR2.6 U2.17
INT_RTC: R1_PINH1.1 TP15.TP U2.8 U5.3
IO/BOOT: BOOT_BUTTON.3 BOOT_BUTTON.4 C6.1 R_BOOT.1 U2.15
IO/CHANGE: C10.1 CHANGE_BUTTON.3 CHANGE_BUTTON.4 R_CHANGE.1 U2.23
MISO: D12.2 J2.P7 R8.1 TP6.TP U2.27 U6.2
MOSI: D11.2 J2.P3 J3.14 R7.1 TP7.TP U2.7 U6.5
N$1: EPD_C12.2 J3.24
N$2: C1_BAT1.1 D2.1 IC1.1 IC1.3 Q1.2
N$3: J1.A5 R2-USB1.2
N$4: CHG_LED.C R1_BAT.1
N$5: C4.1 D3.2 D4.1
N$6: R1_BAT.2 U1.1
N$7: SENSOR2.2 SENSOR2.8
N$8: R2_BAT.2 U1.5
N$9: EPD_C10.2 J3.22
N$10: C_DELAY.1 IC2.5
N$11: J1.B5 R2-USB.1
N$12: EPD_C8.2 J3.20
N$13: EPD_C7.2 J3.19
N$14: EPD_C6.2 J3.18
N$21: D7.1 R_CAPACITOR.1
N$22: EPD_C2.2 J3.5
N$23: EPD_C1.2 J3.4
PREVGH: D5.1 EPD_C9.2 J3.21
PREVGL: D4.2 EPD_C11.2 J3.23
RESE: J3.3 Q3.2 R3.2
RESE': R2.2 R3.1 SJ1.2
RESET: C5.1 IC2.1 R_RESET.1 RESET_BUTTON.3 RESET_BUTTON.4 U2.3
RTC_RST: U2.16 U5.4
RX: TP2.TP U2.24
SCK: D10.2 J2.P5 J3.13 R6.1 TP8.TP U2.6 U6.6
SCL: J4.4 R2-PINH.1 SENSOR2.4 U2.20 U4.7 U5.16
SDA: J4.3 R1_PINH.1 SENSOR2.3 U2.19 U4.8 U5.15
SRC: C4.2 D5.2 L1.1 Q3.3
SS_SD: D8.2 J2.P2 R10.1 U2.4
TX: TP1.TP U2.25
USB_D+: D1.4 U2.14
USB_D-: D1.6 U2.13
VBAT: C2_BAT.1 Q1.3 TP3.TP U1.3 U4.2 U4.3
VBUS: C1_BAT.1 C4_USB.1 C5_USB.1 CHG_LED.A D1.2 D2.2 J1.A4 J1.A9 J1.B4 J1.B9 PFMF.050.1.1 PFMF.050.1.2 Q1.1 R1_PWRUSB.2 TP14.TP U1.4
VRTC: C8.1 C10_SUPERCAP.2 R_CAPACITOR.2 U5.14

## Tracks (layer width: path | path; a pad name or v marks a point on that pad's centre or on a via)
3V3  (via drill 0.3)
  Top 0.15: R9.2 6.45,100.2 6.15,100.2 C9.1 | R9.2 13.65,107.4 20.7,107.4 R_BOOT.2 20.85,107.4 v20.85,106.8 | J2.P4 5.55,90.45 1.8,94.2 1.8,98.25 5.55,102 6.9,102 7.5,101.4 R9.2 | 38.55,61.8 38.25,61.5 38.25,60.45 36.6,58.8 36.45,58.8 U6.3 36.3,58.65 v35.55,57.9 | 38.55,61.8 43.65,61.8 44.1,61.35 U6.8 44.25,61.2 44.25,60 U6.7 44.25,59.85 v45.6,59.85 | U2.2 9,48.75 9,48.3 12.3,45 18.9,45 R1.2 19.05,45.15 22.05,45.15 30.15,53.25 33.9,53.25 R8.2 34.05,53.4 34.05,53.85 v34.95,54.75 | 38.55,61.8 27.9,72.45 27.9,84.15 v35.7,91.95 47.4,103.65 IC2.2 | 74.4,13.8 73.2,15 R_CL1.2 | 74.4,13.8 76.05,12.15 78.9,12.15 79.2,12.45 79.2,14.7 77.85,16.05 71.1,16.05 70.95,15.9 70.95,13.8 69.6,12.45 R10.2 | R7.2 50.85,30.15 R6.2 51,30.3 52.8,30.3 R5.2 52.95,30.3 57,30.3 58.05,29.25 | 58.05,29.25 59.25,28.05 | 59.25,28.05 69.15,18.15 69.15,17.1 Q2.3 | 74.4,13.8 69.75,9.15 65.7,9.15 58.35,16.5 58.35,27.45 57.6,28.2 57.6,28.8 58.05,29.25 | D7.2 90.75,64.65 90.6,64.5 90.6,63 R1_PINH1.2 90.6,62.85 v91.2,62.25 | v89.7,49.65 89.7,48.9 R2_PINH1.2 | v89.7,59.25 89.7,60.45 89.4,60.75 U5.2 | 122.85,37.2 125.4,37.2 C3.+ | 122.85,37.2 120.6,37.2 119.25,35.85 116.4,35.85 113.25,39 113.25,40.5 114,41.25 115.05,41.25 115.2,41.1 115.2,40.05 114.6,39.45 C1_BAT2.1 | v122.85,40.35 122.4,40.8 122.1,40.8 IC1.5 | 122.85,37.2 v122.85,38.1 | v159.75,18.9 165.15,18.9 J4.2 | v121.05,57.45 121.05,59.4 TP16.TP | v59.7,28.5 59.25,28.05
  Top 0.3: R_RESET.2 46.24,107.11 46.24,104.73 47.03,103.94 47.23,103.94 IC2.2 47.97,103.94 48.16,103.94 50.27,106.05 59.36,106.05 R_CHANGE.2
  Bottom 0.15: v35.55,57.9 35.55,55.35 v34.95,54.75 | v35.7,91.95 v20.85,106.8 | 89.7,54.45 v89.7,59.25 91.2,60.75 v91.2,62.25 | 89.7,54.45 v89.7,49.65 68.55,28.5 v59.7,28.5 59.7,46.2 46.05,59.85 v45.6,59.85 | v159.75,18.9 142.05,18.9 v122.85,38.1 v122.85,40.35 121.05,42.15 121.05,54.45 | 121.05,54.45 v121.05,57.45 | 121.05,54.45 89.7,54.45
32KHZ
  Top 0.15: 87.6,52.8 87.6,53.55 88.95,54.9 90.75,54.9 92.55,53.1 92.55,51.9 92.7,51.75 93.75,51.75 93.9,51.9 93.9,57.6 90.75,60.75 U5.1 | 87.6,52.8 87.6,50.25 88.35,49.5 88.35,48.9 R2_PINH1.1 | 87.6,52.8 81.45,52.8 75.9,47.25 44.1,47.25 36,55.35 24,55.35 17.85,49.2 17.85,48.75 U2.9
DN  (via drill 0.3)
  Top 0.15: v162.3,53.55 162.8,53.55 | 162.8,53.55 J1.B7 | v157.2,53.55 152.55,48.9 D1.1 | J1.A7 163.46,54.4 162.94,54.4 162.8,54.26 162.8,53.55
  Bottom 0.15: v157.2,53.55 v162.3,53.55
DP
  Top 0.15: J1.A6 164.4,54.05 165,54.65 164.6,55.05 J1.B6 163.46,54.9 162.94,54.9 156.15,48.11 156.15,45.85 155.7,45.85 155.66,45.88 153.52,45.88 D1.3
EPD_3V3  (via drill 0.3)
  Top 0.15: C7.1 81.75,23.25 81.75,24.9 L1.2 81.75,25.05 82.2,25.5 89.4,25.5 91.5,23.4 91.5,20.85 91.2,20.55 88.65,20.55 88.05,19.95 87.75,19.95 EPD_C5.2 v87.75,18.3 | J3.15 83.7,15.3 J3.16 83.55,15.15 83.55,14.85 v82.8,14.1 | v70.35,14.1 70.35,14.85 Q2.2 | v99.6,18.3 101.25,18.3 TP17.TP
  Bottom 0.15: v70.35,14.1 v82.8,14.1 82.8,15 86.1,18.3 v87.75,18.3 v99.6,18.3
EPD_3V3_C  (via drill 0.3)
  Top 0.15: 67.65,14.85 68.25,14.85 Q2.1 | 67.65,14.85 65.4,12.6 65.4,9.9 65.85,9.45 69.45,9.45 71.7,11.7 71.7,15 R_CL1.1 | TP13.TP 12.3,77.1 20.25,69.15 20.25,66.3 U2.18 20.4,66.15 20.4,65.85 30.6,55.65 36.15,55.65 36.45,55.35 v36.75,55.35 | 67.65,14.85 67.65,18.9 v58.05,28.5
  Bottom 0.15: v58.05,28.5 58.05,47.4 46.05,59.4 40.8,59.4 v36.75,55.35
EPD_BUSY  (via drill 0.3)
  Top 0.15: J3.9 87.15,14.1 v85.95,12.9 | v83.7,10.65 74.4,10.65 72,8.25 40.5,8.25 5.7,43.05 TP9.TP 5.7,43.2 v6.9,44.4 | v6.9,50.4 6.9,58.5 10.05,61.65 10.05,66.15 U2.26
  Bottom 0.15: v83.7,10.65 v85.95,12.9 | v6.9,44.4 v6.9,50.4
EPD_CS  (via drill 0.3)
  Top 0.15: v85.65,14.4 J3.12 | TP10.TP 111.75,18.15 110.4,16.8 v104.55,16.8 97.8,16.8 92.4,11.4 74.4,11.4 v73.8,10.8 | v7.5,99.15 7.5,100.05 R9.1 | v19.95,50.55 19.95,49.05 20.25,48.75 U2.11 | v33.6,50.55 34.65,51.6 34.65,52.5 35.25,53.1 35.25,53.4 D6.2
  Bottom 0.15: v85.65,14.4 85.95,14.4 88.35,16.8 v104.55,16.8 | v7.5,99.15 7.5,90.6 6.6,89.7 6.6,66.9 6.9,66.6 6.9,57.3 13.65,50.55 | 13.65,50.55 v19.95,50.55 v33.6,50.55 | v73.8,10.8 46.8,10.8 10.95,46.65 10.95,47.85 13.65,50.55
EPD_DC  (via drill 0.3)
  Top 0.15: v86.25,13.95 86.25,15.15 J3.11 | v110.7,21.3 111.6,22.2 TP11.TP | v15.75,45.45 12.75,48.45 12.75,48.75 U2.5
  Bottom 0.15: v86.25,13.95 103.35,13.95 106.65,17.25 | v110.7,21.3 106.65,17.25 | v15.75,45.45 16.95,45.45 34.65,27.75 76.35,27.75 83.7,35.1 88.8,35.1 106.65,17.25
EPD_RST  (via drill 0.3)
  Top 0.15: v86.7,14.4 86.7,15.15 J3.10 | v105.75,17.25 106.8,18.3 TP12.TP 106.8,18.45 105.3,19.95 105.3,45.15 95.25,55.2 v95.25,61.35 | v17.1,67.35 16.5,66.75 16.5,66.3 U2.21
  Bottom 0.15: v86.7,14.4 102.9,14.4 v105.75,17.25 | v17.1,67.35 19.35,67.35 22.8,63.9 92.7,63.9 v95.25,61.35
FLASH_CS  (via drill 0.3)
  Top 0.15: v34.2,59.1 36.3,61.2 U6.1 | v27,51.9 24.45,51.9 21.6,49.05 21.6,48.75 U2.12 | v57.9,24 R5.1 v52.2,29.7 | v73.5,24 76.05,24 76.2,23.85 76.2,22.35 77.1,21.45 77.1,21.15 D9.2
  Bottom 0.15: v27,51.9 31.8,56.7 | 31.8,56.7 v34.2,59.1 | v73.5,24 v57.9,24 | 31.8,56.7 34.2,54.3 40.65,54.3 44.7,58.35 46.2,58.35 52.2,52.35 v52.2,29.7
GDR  (via drill 0.3)
  Top 0.15: v90.75,18.9 90.75,15.3 J3.2 | v76.95,24 76.95,24.6 Q3.1 | v73.5,22.5 74.25,23.25 R4.2
  Bottom 0.15: v90.75,18.9 85.2,24.45 77.4,24.45 v76.95,24 75.3,24 73.8,22.5 v73.5,22.5
GND  (via drill 0.3, 0.35)
  Top 0.15: J1.B12 163.65,51.15 163.65,51 J1.A1 | J1.MP1 168.15,49.2 168.15,59.4 J1.MP2 168,59.4 164.25,59.4 J1.MP4 | J1.B1 163.65,57.45 163.65,57.6 J1.A12 163.65,57.75 163.65,58.95 | 163.65,58.95 164.1,59.4 J1.MP4 | 153.6,63.75 158.85,63.75 163.65,58.95 | 153.6,63.75 152.4,63.75 TP5.TP | 163.65,58.95 J1.MP4 | C2.2 157.35,6.3 158.25,6.3 C1.2 158.25,6.45 158.25,8.7 157.95,9 SENSOR2.5 157.95,9.45 157.5,9.9 156.75,9.9 156.45,9.6 156.45,9.15 SENSOR2.7 156.45,9 155.85,8.4 155.25,8.4 154.95,8.7 154.95,10.35 155.4,10.8 155.4,12 SENSOR2.1 155.55,12.15 155.55,13.95 159.3,17.7 | 159.3,17.7 165.15,17.7 J4.1 | 113.85,39.3 113.85,40.05 114.45,40.65 C1_BAT2.2 | 113.85,39.3 113.85,38.85 115.65,37.05 116.7,37.05 C1_BAT1.2 116.85,36.9 117.6,36.15 118.5,36.15 120,37.65 120,39.9 | 120,39.9 125.1,39.9 125.4,40.2 C3.- 126.6,39.15 128.7,39.15 R1_PWRUSB.1 128.85,39.15 151.35,39.15 | 120,39.9 119.4,39.9 IC1.2 | v155.7,50.25 156.45,51 C4_USB.2 | v156,48.6 156,48.45 155.4,47.85 155.1,47.85 D1.5 | R2-USB1.1 154.05,44.1 155.1,45.15 R2-USB.2 | 150.9,46.8 150.9,48 150.15,48.75 C5_USB.2 | 150.9,46.8 v152.85,44.85 153.6,44.1 153.9,44.1 R2-USB1.1 | 135.6,51.75 135.75,51.9 U4.9 | 135.6,51.75 135.15,51.3 134.85,51.3 U4.4 | 135.6,51.75 136.65,51.75 U4.6 136.8,51.6 144,51.6 144.9,50.7 | 135.6,51.75 U4.9 | U4.9 135.75,52.05 135.15,52.65 134.85,52.65 U4.1 134.7,52.8 129.6,52.8 C2_BAT.2 129.6,52.65 120.9,52.65 118.2,49.95 | U1.2 125.85,49.95 126.15,49.95 126.75,49.35 126.75,48.75 123.75,45.75 123.15,45.75 R2_BAT.1 123,45.75 122.4,45.75 118.2,49.95 | 118.2,49.95 117.6,50.55 C1_BAT.2 | 150.9,46.8 148.8,46.8 144.9,50.7
  Top 0.15: 151.35,39.15 153.9,41.7 153.9,43.95 R2-USB1.1 | 159.3,17.7 159.3,31.2 151.35,39.15 | 153.6,63.75 153.6,59.4 144.9,50.7 | 78.6,12.9 76.5,12.9 73.65,15.75 71.25,15.75 71.25,11.7 69.3,9.75 67.05,9.75 66.3,10.5 66.3,10.8 SJ1.1 66.3,10.95 66.6,11.25 66.6,12.6 R2.1 | 87,15.9 87.45,15.9 87.6,15.75 87.6,15.3 J3.8 | 87,15.9 83.4,15.9 83.25,15.75 83.25,15.3 J3.17 | EPD_C1.1 90.6,21.3 89.4,21.3 EPD_C2.1 89.25,21.3 87.75,21.3 | 87.75,21.3 87,21.3 | 87,21.3 86.25,21.3 EPD_C6.1 86.1,21.3 84.6,21.3 EPD_C7.1 84.45,21.15 82.95,21.15 EPD_C8.1 82.95,21.3 82.95,21.75 v83.1,21.9 | 87.75,21.3 EPD_C5.1 | 87,21.3 87,15.9 | 80.4,21.15 81,21.15 EPD_C9.1 81,21.3 v81.6,21.9 | 80.4,21.15 79.35,21.15 EPD_C10.1 | 80.4,21.15 80.4,23.1 C7.2 80.4,23.25 78.75,23.25 78.15,23.85 78.15,24.6 77.55,25.2 | EPD_C11.1 73.8,18.9 72.9,18.9 EPD_C12.1 72.9,19.05 72.9,21 | 72.9,24.15 73.35,24.6 R4.1 74.85,25.2 77.55,25.2 | 72.9,21 72.9,24.15 | 72.9,21 75.6,21 D9.1 | v78.6,14.55 78.6,12.9 | 78.6,12.9 J3.MP2 | C8.2 94.8,61.5 94.8,53.85 C10_SUPERCAP.1 95.55,52.65 96.45,51.75 96.45,50.1 94.5,48.15 86.85,48.15 | 97.2,28.35 91.5,34.05 86.85,34.05 | 97.2,28.35 102.75,22.8 102.75,21.75 102,21 101.55,21 93.45,12.9 92.25,12.9 J3.MP1 | 86.85,34.05 80.85,34.05 79.95,33.15 D3.1 79.8,33 77.55,30.75 77.55,25.2 | 86.85,34.05 86.85,48.15 | 86.85,48.15 86.85,51.3 U5.13 | 2.1,82.35 2.1,78.3 3.15,77.25 TP4.TP 3.3,77.1 7.5,72.9 7.5,66.3 U2.28 7.65,66.15 v7.65,61.65 | 4.8,100.05 3.15,98.4 3.15,95.55 J2.G4 3.15,95.4 3.15,95.1 5.55,92.7 J2.P6 5.7,92.55 6.3,92.55 7.8,91.05 J2.G2 16.35,91.05 17.1,90.3 17.1,87.15 16.35,86.4 16.35,85.35 J2.G1 16.2,85.35 16.2,84.75 13.8,82.35 2.1,82.35
  Top 0.15: 4.8,100.05 6,101.25 C9.2 | 4.8,100.05 6.15,98.7 10.65,98.7 D8.1 10.8,98.85 11.4,99.45 14.25,99.45 22.2,107.4 BOOT_BUTTON.1 22.35,107.55 25.65,107.55 BOOT_BUTTON.2 25.8,107.55 v26.7,106.65 | 2.1,82.35 J2.G3 | v28.05,108 28.05,108.14 | 14.55,56.1 14.55,57.15 U2.29_9 | 12.15,56.1 12.15,57.15 U2.29_3 12,57.3 v10.2,59.1 | 13.35,56.1 13.35,57.15 U2.29_6 | 12.15,56.1 13.2,56.1 U2.29_5 13.35,56.1 | 12.15,56.1 U2.29_2 | 13.35,56.1 14.55,56.1 | 14.55,56.1 U2.29_8 14.55,55.95 U2.29_7 | U2.29_7 13.35,54.75 U2.29_4 13.2,54.75 12.15,54.75 U2.29_1 12,54.75 10.35,54.75 7.65,52.05 7.65,48.75 | U2.29_7 | 38.4,57.45 36.45,57.45 U6.4 | 38.4,57.45 40.2,59.25 U6.9 | 35.55,44.4 44.7,35.25 D12.1 44.85,35.25 50.85,35.25 D11.1 51,35.4 52.65,35.4 D10.1 52.8,35.25 53.7,35.25 64.8,24.15 72.9,24.15 | 35.55,44.4 35.4,44.55 35.4,51.9 D6.1 35.4,52.05 v36.3,52.95 | 38.4,57.45 38.4,55.2 v39.75,53.85 | 7.65,48.75 7.65,48.45 11.7,44.4 35.55,44.4 | 7.65,48.75 U2.1 | v113.7,39.3 113.85,39.3 | 97.2,28.35 v104.7,35.85
  Top 0.3: IC2.3 48.57,101.65 53.6,101.65 54.5,102.55 54.5,103.15 53.02,104.63 C_DELAY.2 52.07,104.63 v53,103.7 | CHANGE_BUTTON.2 67.17,107.5 C10.2 67.79,107.51 68.35,106.95 67.25,105.85 65.45,105.85 63.8,107.5 CHANGE_BUTTON.1 62.06,107.5 61.41,108.16 60.27,108.16 59.62,107.5 54.8,107.5 54.65,107.35 52.3,107.35 C5.2 | C5.2 52.9,106.75 v54.85,106.75 | C5.2 50.76,107.54 RESET_BUTTON.2 RESET_BUTTON.1 47.04,107.5 46.41,108.14 28.05,108.14 27.92,108.14 C6.2 | J1.MP1 J1.MP3 163.6,49.77 J1.A1
  Bottom 0.15: v155.7,50.25 155.7,48.9 v156,48.6 156,48 v152.85,44.85 | v83.1,21.9 v81.6,21.9 78.6,18.9 v78.6,14.55 | v26.7,106.65 v28.05,108 | v39.75,53.85 37.2,53.85 v36.3,52.95 | v10.2,59.1 v7.65,61.65 | v113.7,39.3 108.15,39.3 v104.7,35.85
  Bottom 0.3: v54.85,106.75 56.05,105.55 56.05,104.45 55,103.4 53.3,103.4 v53,103.7
  pour Top: 6.46,48.31 6.39,48.24 6.37,48.22 0.18,48.22 0.18,0.18 76.12,0.18 76.12,10.07 76.14,10.09 76.21,10.16 76.23,10.18 94.57,10.18 94.59,10.16 94.66,10.09 94.68,10.07 94.68,0.18 170.02,0.18 170.02,67.02 92.18,67.02 92.16,67.04 92.04,67.16 92.02,67.18 92.02,111.02 68.58,111.02 68.58,109.78 68.56,109.76 68.54,109.74 68.52,109.72 19.68,109.72 19.66,109.74 19.59,109.81 19.57,109.83 19.57,111.02 0.18,111.02 0.18,66.88 6.37,66.88 6.39,66.86 6.46,66.79 6.48,66.77 6.48,48.33
  pour Bottom: 6.46,48.26 6.44,48.24 6.42,48.22 0.18,48.22 0.18,0.18 76.12,0.18 76.12,10.07 76.14,10.09 76.21,10.16 76.23,10.18 94.57,10.18 94.59,10.16 94.66,10.09 94.68,10.07 94.68,0.18 170.02,0.18 170.02,67.02 92.13,67.02 92.11,67.04 92.04,67.11 92.02,67.13 92.02,111.02 68.58,111.02 68.58,109.78 68.56,109.76 68.54,109.74 68.52,109.72 19.68,109.72 19.66,109.74 19.59,109.81 19.57,109.83 19.57,111.02 0.18,111.02 0.18,66.88 6.37,66.88 6.39,66.86 6.46,66.79 6.48,66.77 6.48,48.28
GPIO8
  Top 0.15: R1.1 19.05,46.35 19.05,48.75 U2.10
I2C_PW  (via drill 0.3)
  Top 0.15: C1.1 158.25,5.1 157.35,5.1 C2.1 157.2,5.1 156,6.3 | 156,6.3 155.1,6.3 R1_PINH.2 154.95,6.45 144.75,6.45 112.95,38.25 112.95,38.4 96.15,55.2 v96.15,61.35 | SENSOR2.6 157.05,9 157.05,7.35 156.15,6.45 R2-PINH.2 156,6.3 | v22.5,64.95 21.6,65.85 21.6,66.15 U2.17
  Bottom 0.15: v22.5,64.95 92.55,64.95 v96.15,61.35
INT_RTC  (via drill 0.3)
  Top 0.15: 88.2,61.2 89.25,62.25 89.25,62.85 R1_PINH1.1 | 88.2,61.2 88.2,60.9 U5.3 | v17.4,47.55 16.5,48.45 16.5,48.75 U2.8 | v45.9,48.9 68.25,48.9 81.45,62.1 87.3,62.1 88.2,61.2 | 88.2,61.2 U5.3 | v111.45,56.1 120.6,56.1 TP15.TP | v92.1,56.1 88.2,60 88.2,60.75 U5.3
  Bottom 0.15: v17.4,47.55 18.75,47.55 20.1,48.9 v45.9,48.9 | v92.1,56.1 v111.45,56.1
IO/BOOT
  Top 0.15: U2.15 27.18,69.33 C6.1 27.15,107.7 26.55,108.3 26.4,108.3 25.8,108.9 BOOT_BUTTON.3 25.65,109.05 22.35,109.05 BOOT_BUTTON.4 22.2,108.9 20.85,108.9 R_BOOT.1
IO/CHANGE  (via drill 0.35)
  Top 0.15: v14.05,68.5 14.05,66.36 U2.23 | C10.1 66.99,109 CHANGE_BUTTON.3 CHANGE_BUTTON.4 62.09,108.83 R_CHANGE.1 60.54,108.53 60.12,108.53 59.64,108.05 v55.9,108.05
  Bottom 0.15: v55.9,108.05 55.05,107.2 54.66,107.2 15.96,68.5 v14.05,68.5
MISO  (via drill 0.3)
  Top 0.15: 9,67.95 9,75.9 10.65,77.55 10.65,77.85 17.4,84.6 17.4,91.8 16.5,92.7 7.05,92.7 6,93.75 J2.P7 | 9,67.95 9,66.3 U2.27 | 35.85,54.3 34.95,54.3 34.65,54 34.65,52.95 34.35,52.65 34.35,52.5 34.05,52.2 R8.1 | 35.85,54.3 44.7,45.45 44.7,36.75 D12.2 | v36.3,59.25 36.3,59.85 U6.2 | 35.85,54.3 v35.85,54.75 | v147.15,60 152.25,60 TP6.TP | v115.2,66.6 91.5,66.6 86.7,71.4 57.75,71.4 v46.5,60.15 | v13.5,67.95 9,67.95
  Bottom 0.15: v36.3,59.25 36.3,55.2 v35.85,54.75 | v147.15,60 121.8,60 v115.2,66.6 | v46.5,60.15 46.05,60.15 45.9,60.3 37.35,60.3 v36.3,59.25 | v13.5,67.95 14.85,67.95 17.4,65.4 17.4,64.2 22.05,59.55 36,59.55 v36.3,59.25
MOSI  (via drill 0.3)
  Top 0.15: 45,57.45 45.3,57.45 46.05,58.2 46.05,60.3 34.2,72.15 30.75,72.15 TP7.TP 30.6,72.3 28.35,74.55 v28.35,82.2 | 45,57.45 44.25,57.45 U6.5 | v7.35,89.25 6,89.25 J2.P3 | v82.65,13.2 83.55,14.1 83.85,14.1 84.6,14.85 84.6,15.15 J3.14 | v60.45,13.2 44.85,28.8 R7.1 44.85,28.95 v45.45,29.55 | v49.8,35.7 50.85,36.75 D11.2 | v18.15,45.45 15.3,48.3 15.3,48.75 U2.7 | v45,48.45 45,57.45
  Bottom 0.15: v7.35,89.25 21.3,89.25 v28.35,82.2 | v60.45,13.2 v82.65,13.2 | v49.8,35.7 49.8,33.9 v45.45,29.55 35.7,39.3 | v18.15,45.45 29.55,45.45 35.7,39.3 | v45,48.45 35.85,39.3 35.7,39.3
N$1
  Top 0.15: J3.24 79.05,15.3 77.4,16.95 73.5,16.95 72.9,17.55 EPD_C12.2
N$2
  Top 0.15: 118.2,37.8 118.2,37.05 C1_BAT1.1 | 119.25,38.85 118.2,37.8 | 118.2,37.8 117.15,38.85 116.1,38.85 D2.1 | 119.25,38.85 118.5,39.6 118.5,40.2 118.8,40.5 118.95,40.5 119.25,40.8 IC1.1 119.4,40.95 120,41.55 126.6,41.55 126.9,41.25 126.9,41.1 128.25,39.75 129.3,39.75 132.6,43.05 132.6,46.05 Q1.2 | 119.25,38.85 IC1.3
N$3
  Top 0.15: R2-USB1.2 161.2,50.02 161.2,51.65 162.6,53.05 J1.A5
N$4
  Top 0.15: CHG_LED.C 120,50.55 120,49.35 R1_BAT.1
N$5
  Top 0.15: C4.1 93.9,28.2 93.6,28.2 93,27.6 89.55,27.6 88.95,28.2 D4.1 88.8,28.35 84.15,33 83.55,33 D3.2
N$6
  Top 0.15: R1_BAT.2 121.35,49.35 122.25,49.35 122.4,49.5 125.1,49.5 125.7,48.9 U1.1
N$7
  Top 0.15: SENSOR2.8 155.55,9.15 155.55,10.5 156.3,11.25 156.3,12 SENSOR2.2
N$8
  Top 0.15: R2_BAT.2 123.15,47.1 123.15,48.9 U1.5
N$9
  Top 0.15: J3.22 80.55,15.3 80.55,18.6 79.35,19.8 EPD_C10.2
N$10
  Top 0.15: IC2.5 51.59,103.33 C_DELAY.1
N$11
  Top 0.15: R2-USB.1 153.9,45.3 152.85,45.3 151.2,46.95 151.2,48.15 151.05,48.3 151.05,48.9 158.1,55.95 163.5,55.95 J1.B5
N$12
  Top 0.15: J3.20 81.75,15.3 81.75,18.75 82.8,19.8 EPD_C8.2
N$13
  Top 0.15: EPD_C7.2 82.2,17.55 82.2,15.3 J3.19
N$14
  Top 0.15: J3.18 82.65,16.95 84.9,19.2 85.5,19.2 86.1,19.8 EPD_C6.2
N$21
  Top 0.15: D7.1 88.8,64.65 90,63.45 90,59.7 93.15,56.55 93.15,52.35 R_CAPACITOR.1
N$22
  Top 0.15: J3.5 89.25,15.3 89.25,19.95 EPD_C2.2
N$23
  Top 0.15: J3.4 89.7,15.3 89.7,19.05 90.6,19.95 EPD_C1.2
PREVGH
  Top 0.15: J3.21 81.15,19.8 EPD_C9.2 81.15,19.95 81.9,20.7 81.9,21.45 85.2,24.75 88.8,24.75 D5.1
PREVGL
  Top 0.15: EPD_C11.2 73.95,17.55 78.3,17.55 80.1,15.75 80.1,15.3 J3.23 80.25,15.15 80.25,14.85 82.65,12.45 89.25,12.45 94.8,18 94.8,28.65 94.5,28.95 93.6,28.95 93,28.35 92.4,28.35 D4.2
RESE  (via drill 0.3)
  Top 0.15: v90.15,18.75 J3.3 | v77.7,24 77.1,23.4 Q3.2 76.95,23.25 76.5,23.7 76.5,24 75.9,24.6 75.6,24.6 R3.2
  Bottom 0.15: v90.15,18.75 87.45,18.75 82.2,24 v77.7,24
RESE'
  Top 0.15: SJ1.2 67.8,10.95 67.95,11.1 67.95,12.6 R2.2 68.1,12.75 69,13.65 69,15 72.3,18.3 74.4,18.3 76.35,20.25 76.35,21.75 75.6,22.5 75.6,23.25 R3.1
RESET  (via drill 0.3)
  Top 0.15: C5.1 52.05,108.9 50.85,108.9 RESET_BUTTON.3 50.7,108.9 49.05,108.9 v48.3,108.15 47.55,108.9 47.25,108.9 RESET_BUTTON.4 47.1,108.9 45.9,108.9 R_RESET.1 | v47.7,106.5 47.7,104.55 IC2.1 | v10.65,54.3 10.2,53.85 10.2,48.75 U2.3
  Bottom 0.15: v48.3,108.15 47.7,107.55 v47.7,106.5 47.7,100.8 23.55,76.65 21.45,76.65 10.65,65.85 v10.65,54.3
RTC_RST
  Top 0.15: U2.16 22.95,66.15 22.95,65.85 32.85,55.95 36.9,55.95 44.55,48.3 44.55,48.15 44.7,48 74.4,48 86.7,60.3 86.7,60.75 U5.4
RX
  Top 0.15: U2.24 12.6,66.15 12.6,63.75 7.35,58.5 7.35,50.1 6.9,49.65 6.9,47.85 46.2,8.55 70.8,8.55 74.1,11.85 82.5,11.85 82.8,12.15 90.6,12.15 100.65,22.2 101.4,22.2 TP2.TP
SCK  (via drill 0.3)
  Top 0.15: v83.85,13.65 85.05,14.85 85.05,15.15 J3.13 | 51.3,28.65 51,28.95 R6.1 51.3,28.65 | 51.3,28.65 v52.65,27.3 | v14.55,83.85 6.9,91.5 6,91.5 J2.P5 | TP8.TP 25.65,72.3 20.85,77.1 v20.85,77.55 13.65,77.55 12.75,78.45 11.7,78.45 10.95,77.7 10.95,72.3 14.55,68.7 v14.55,67.5 | v45,57.9 44.25,58.65 U6.6 | v51.75,36.9 52.65,36.9 D10.2 | v16.35,51.45 13.95,49.05 U2.6 | v51.75,29.1 51.3,28.65
  Bottom 0.15: v83.85,13.65 66.3,13.65 v52.65,27.3 | v20.85,77.55 v14.55,83.85 | 16.95,51.45 38.55,51.45 v45,57.9 45.3,57.9 51.75,51.45 v51.75,36.9 v51.75,29.1 | 16.95,51.45 v16.35,51.45 | v14.55,67.5 14.85,67.5 16.95,65.4 16.95,51.45
SCL  (via drill 0.3)
  Top 0.15: v17.85,64.95 17.85,66.15 U2.20 | 90.6,53.1 v89.25,54.45 | 90.6,53.1 90.6,51.45 U5.16 | SENSOR2.4 157.95,12 159,10.95 159,4.5 158.85,4.35 156.75,4.35 156.15,4.95 R2-PINH.1 156,5.1 155.7,5.4 155.7,5.55 155.55,5.7 154.5,5.7 154.35,5.55 154.35,4.5 155.1,3.75 159.15,3.75 166.5,11.1 166.5,19.95 165.45,21 | 137.4,52.2 138.6,52.2 151.5,65.1 164.85,65.1 169.35,60.6 169.35,24.9 165.45,21 | 137.4,52.2 136.8,52.2 U4.7 | 165.45,21 165.3,20.85 J4.4 165.45,21 | v91.2,53.7 90.6,53.1 | v113.7,53.85 136.35,53.85 137.4,52.8 137.4,52.2
  Bottom 0.15: v17.85,64.95 18.15,64.95 22.2,60.9 82.8,60.9 v89.25,54.45 | v91.2,53.7 113.55,53.7 v113.7,53.85
SDA  (via drill 0.3)
  Top 0.15: 159.3,11.7 159.3,4.35 159,4.05 156,4.05 155.1,4.95 R1_PINH.1 | 159.3,11.7 158.1,12.9 157.65,12.9 157.2,12.45 | 157.2,12.45 157.2,12.15 SENSOR2.3 157.2,12.45 | J4.3 165.6,19.8 166.2,19.2 166.2,17.4 160.5,11.7 159.3,11.7 | v114.15,53.4 134.85,53.4 135.45,52.8 136.65,52.8 U4.8 | 89.4,52.05 v90.15,52.8 | 89.4,52.05 89.4,51.45 U5.15 89.4,52.05 | v19.05,63.3 19.05,66.15 U2.19 | 89.4,52.05 v88.8,52.65 | v156,13.65 157.2,12.45
  Bottom 0.15: v90.15,52.8 91.05,52.8 91.65,53.4 v114.15,53.4 114.15,46.05 146.55,13.65 v156,13.65 | v19.05,63.3 19.35,63.3 22.05,60.6 80.85,60.6 v88.8,52.65
SRC
  Top 0.15: C4.2 88.2,29.55 84,33.75 82.8,33.75 81.75,32.7 81.75,29.7 L1.1 | Q3.3 79.05,24 78.75,24.3 78.75,26.7 81.6,29.55 L1.1 | D5.2 92.25,24.9 90.45,24.9 85.8,29.55 81.75,29.55 L1.1
SS_SD  (via drill 0.3)
  Top 0.15: v12.15,93.9 12.15,98.7 D8.2 | v7.95,89.7 7.95,89.1 7.2,88.35 6.3,88.35 J2.P2 | v68.7,11.85 R10.1 | v12.3,47.55 11.4,48.45 U2.4 11.4,49.05 15.3,52.95 15.3,57.6 12.3,60.6 v10.2,60.6
  Bottom 0.15: v12.15,93.9 v7.95,89.7 7.05,89.7 6.9,89.55 6.9,67.05 10.2,63.75 v10.2,60.6 | v68.7,11.85 48,11.85 v12.3,47.55
TX  (via drill 0.3)
  Top 0.15: U2.25 11.4,65.85 v12.15,65.1 | v16.5,65.1 18.75,62.85 v22.65,62.85 | v93,62.85 94.65,62.85 95.7,61.8 95.7,55.2 106.5,44.4 106.5,22.35 TP1.TP
  Bottom 0.15: v16.5,65.1 v12.15,65.1 | v93,62.85 v22.65,62.85
USB_D+  (via drill 0.3)
  Top 0.15: v154.05,46.95 154.95,46.95 D1.4 | v99.9,59.7 98.55,59.7 92.7,65.55 54,65.55 v45.45,57 | v25.05,49.65 24.15,48.75 U2.14
  Bottom 0.15: v154.05,46.95 154.05,47.7 142.05,59.7 v99.9,59.7 | v45.45,57 44.55,57 37.2,49.65 v25.05,49.65
USB_D-  (via drill 0.3)
  Top 0.15: v153.6,47.4 153.6,47.7 154.65,48.75 154.95,48.75 D1.6 | v116.55,35.4 v141.6,35.4 | v23.7,49.95 22.95,49.2 22.95,48.75 U2.13
  Bottom 0.15: v141.6,35.4 v153.6,47.4 | v116.55,35.4 75.9,35.4 68.55,28.05 52.05,28.05 50.25,29.85 50.25,45.3 46.2,49.35 25.5,49.35 25.35,49.2 24.45,49.2 v23.7,49.95
VBAT  (via drill 0.3)
  Top 0.15: U4.2 134.7,52.05 134.7,51.75 U4.3 134.7,51.6 134.1,51.6 131.7,49.2 | 131.7,49.2 131.7,48.3 Q1.3 | 129.6,51.3 131.7,49.2 | v126.9,51 125.85,51 U1.3 | v128.7,51 129.3,51 129.6,51.3 | 129.6,51.3 C2_BAT.1 | v9.45,77.1 7.65,77.1 TP3.TP | v26.7,77.1 v23.25,77.1
  Bottom 0.15: v128.7,51 v126.9,51 126.9,52.35 121.35,57.9 100.95,57.9 81.75,77.1 v26.7,77.1 | v23.25,77.1 v9.45,77.1
VBUS  (via drill 0.3)
  Top 0.15: C4_USB.1 156.45,49.8 154.8,49.8 152.85,47.85 152.55,47.85 D1.2 152.4,47.85 152.1,48.15 151.95,48.15 v151.5,48.6 | 163.65,52.05 163.65,51.75 J1.A4 163.05,51.75 162.75,51.45 162.75,50.4 155.4,43.05 155.4,41.55 PFMF.050.1.2 | C5_USB.1 150,47.55 149.4,48.15 149.4,49.2 v150.15,49.95 156.75,56.55 J1.B4 163.65,56.55 | 163.65,56.55 163.65,56.85 J1.A9 | 163.65,52.05 164.25,52.05 165.3,53.1 165.3,55.5 164.25,56.55 163.65,56.55 | 163.65,52.05 J1.B9 | CHG_LED.A 121.65,50.7 123,50.7 123.15,50.85 U1.4 123.3,51 124.65,51 125.1,51.45 127.2,51.45 130.8,47.85 130.8,46.8 | 130.8,46.8 130.8,46.2 Q1.1 | 130.8,46.8 133.2,46.8 138.45,41.55 PFMF.050.1.1 150.9,41.55 v150.9,45.45
  Top 0.3: TP14.TP 90.19,66.2 100.53,66.2 C1_BAT.1 116.18,41.1 D2.2 117.53,42.45 127.55,42.45 128.81,41.19 | 128.81,41.19 R1_PWRUSB.2 | 128.81,41.19 130.81,43.19 Q1.1
  Bottom 0.15: v150.15,49.95 v151.5,48.6 151.5,46.05 v150.9,45.45
VRTC
  Top 0.15: 94.2,51 95.4,51 C10_SUPERCAP.2 | 94.2,51 93.3,51 R_CAPACITOR.2 93.15,51 92.25,50.1 89.1,50.1 88.2,51 88.2,51.3 U5.14 | 94.2,51 94.2,60.75 C8.1